# Altium PCB limit-sw1.PcbDoc
Units mm, origin at the board's own origin, x right, y up, seen from the top; angles counter-clockwise.
Board outline 18.89 x 14.5 mm, 2 copper layers (Top Layer, Bottom Layer), stack 1.07 mm thick; 4 components, 6 nets, 30 pads, 6 vias.
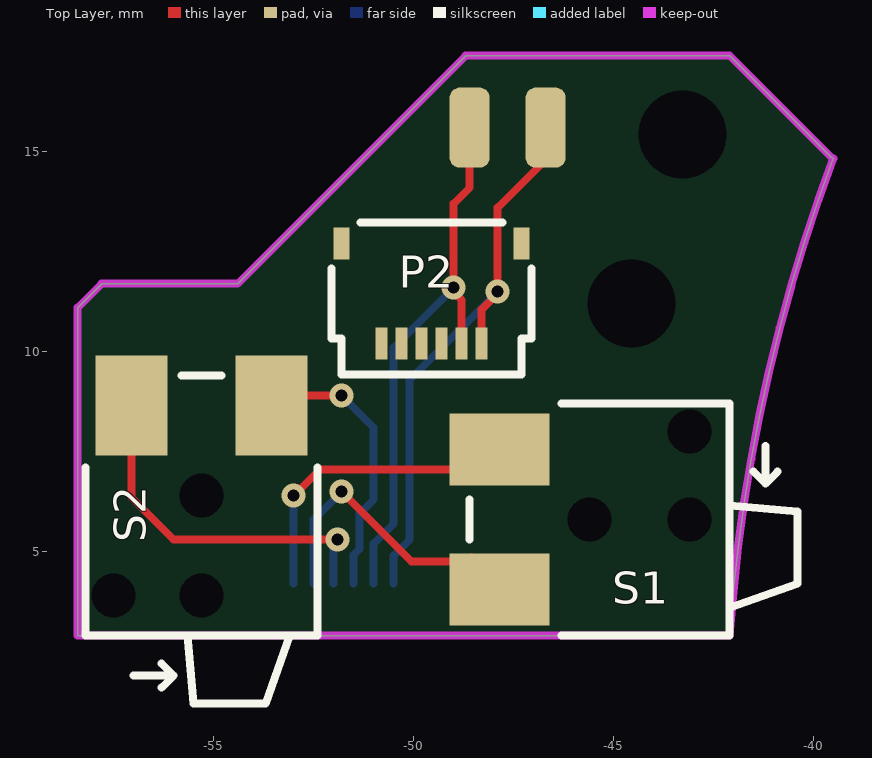
[diagram p0: Top Layer view]
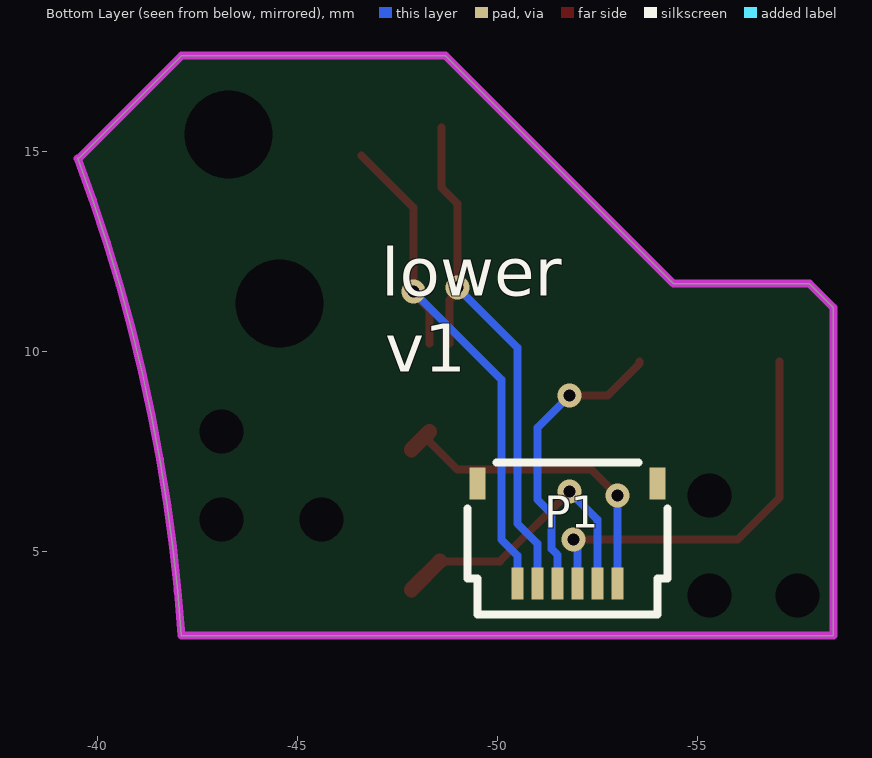
[diagram p1: Bottom Layer view, seen from below]
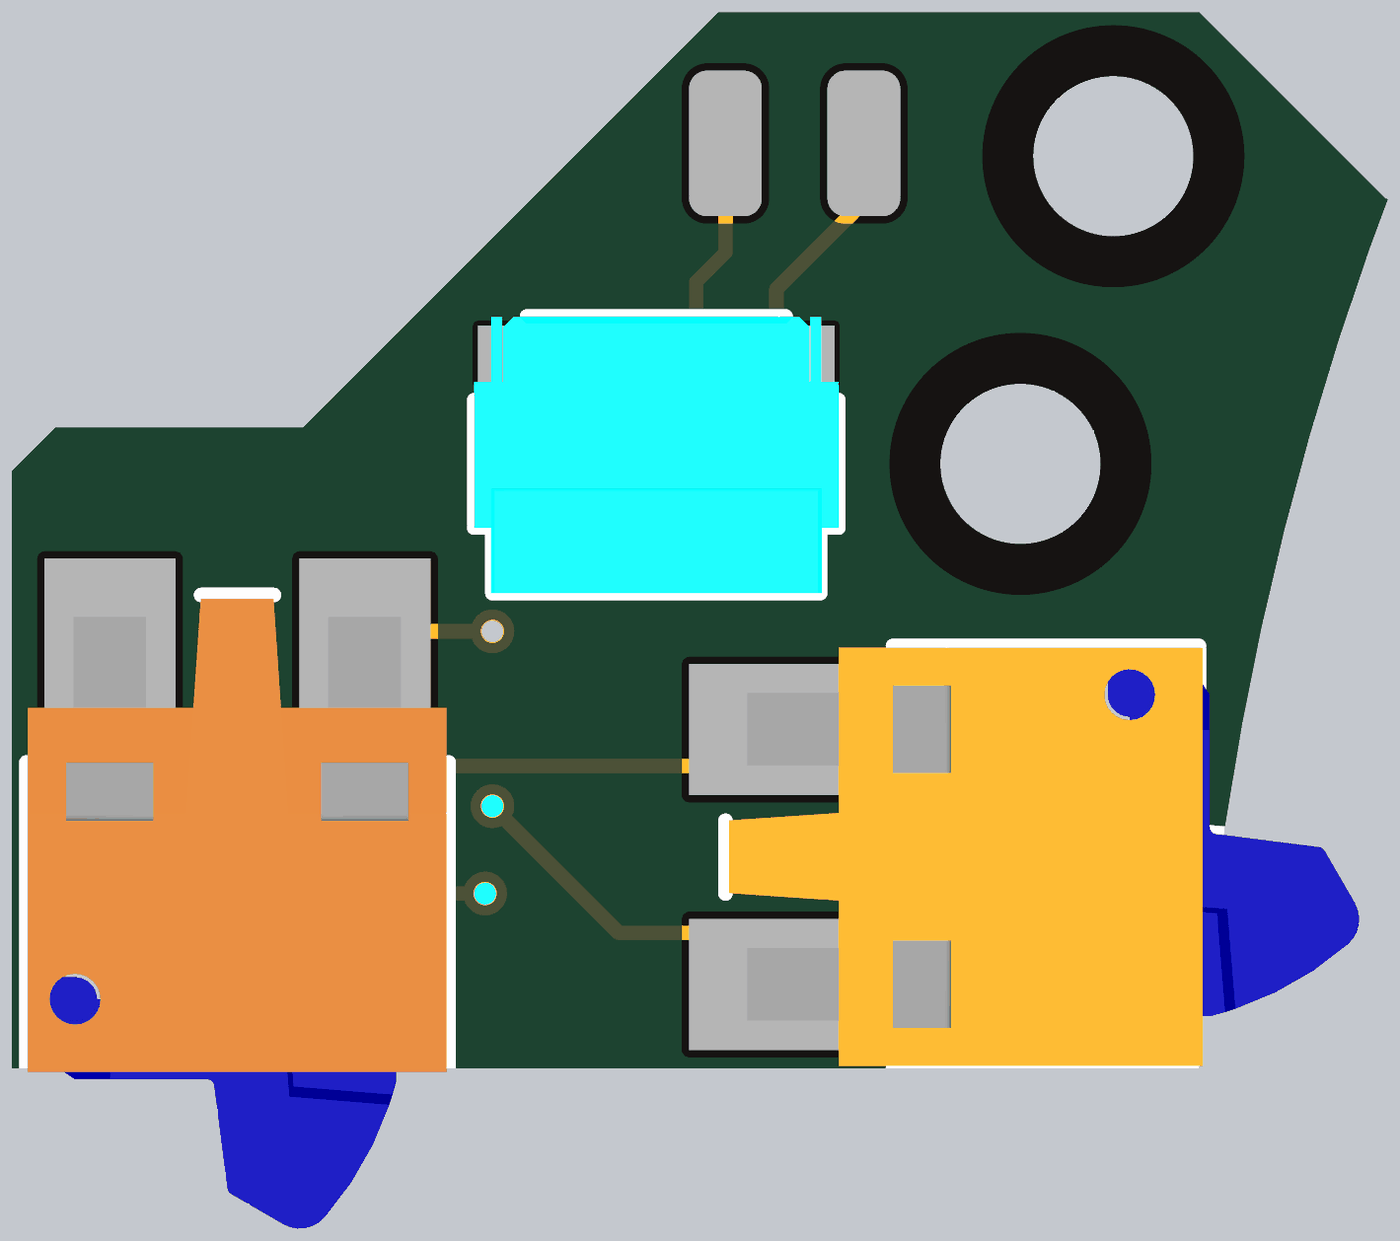
[diagram p2: 3D render of the assembled board from above, using the file's embedded part models]

## Layer stack, top to bottom
Top Solder: solder mask 0.0254, SM-001, Dk 4
Top Layer: signal copper 0.035
Dielectric 1: core 1, Core-043, Dk 4.3
Bottom Layer: signal copper 0.035
Bottom Solder: solder mask 0.0254, SM-001, Dk 4

## Board outline
-58.4,2.9 -58.4,11.1 -57.8,11.7 -54.4,11.7 -48.7,17.4 -42.1,17.4 -39.55,14.85 -39.507,14.834 ccw(c0,0) -42.1,2.9

## Design rules (kind name [scope] priority, off if disabled: settings)
Clearance [All] p1: gap=0.15 ignorepadtopadclearanceinfootprint=FALSE except(0: Arc-Hole Track-Hole SMDPad-Hole THPad-Hole Via-Hole Fill-Hole Poly-Hole Region-Hole Text-Hole)
PolygonConnect [All] p1: connectstyle=Relief reliefconductorwidth=0.254 reliefentries=4 polygonreliefangle="90 Angle" airgapwidth=0.254
RoutingVias [All] p1: holewidth=0.3 width=0.6 viastyle="Through Hole" minholewidth=0.3 minwidth=0.6 maxholewidth=0.5 maxwidth=0.8
SolderMaskExpansion [All] p1: expansion=0.102 istentingtop=FALSE
Width [All] p1: maxlimit=5 minlimit=0.15 preferedwidth=0.15
30 further rules are at their usual default settings.

## Components (designator, comment, footprint, x,y, rotation, side; value= is the part's Value field where it differs from the comment)
P1 "FH34SRJ-6S-0.5SH(50)" HRS_FH34SRJ-6S-0.5SH(50) -51.75,4.2 r0 bottom
P2 "FH34SRJ-6S-0.5SH(50)" HRS_FH34SRJ-6S-0.5SH(50) -49.55,10.2 r180 top
S1 "SW-SPST" ESE22MH22 -45.6,5.8 r270 top
S2 "SW-SPST" ESE22MH24 -55.3,6.4 r180 top

## Footprints (in the part's own frame and the unit in brackets; to place one, negate y for a bottom-side part, rotate by r counter-clockwise, add the part's x,y. Pads: shape width x height; smd on the part's side, far side on the other; paste and mask are expansions set on the pad)
ESE22MH22 [mm] "Detector switch"
  round 1 hole 1.1 unplated: 0(-2.2,2.5) 0(0,2.5) 0(0,0)
  rect 1.8x2.5 smd: 1(-1.75,-2.25) 2(1.75,-2.25)
  silkscreen extent -2.9,-3 2.9,5.2, body extent -2.88,-2.95 2.87,5.7, height 2
ESE22MH24 [mm] "Detector switch"
  round 1 hole 1.1 unplated: 0(0,2.5) 0(0,0) 0(2.2,2.5)
  rect 1.8x2.5 smd: 1(-1.75,-2.25) 2(1.75,-2.25)
  silkscreen extent -2.9,-3 2.9,5.2, body extent -2.87,-2.95 2.88,5.7, height 2
HRS_FH34SRJ-6S-0.5SH(50) [mm] "Top/bottom entry, back-lock 0.3mm thick FPC, 6 pins"
  rect 0.4x0.8 smd mask+0.07: 0(-2.25,-2.5) 0(2.25,-2.5)
  rect 0.3x0.8 smd mask+0.07: 1(1.25,0) 2(0.75,0) 3(0.25,0) 4(-0.25,0) 5(-0.75,0) 6(-1.25,0)
  silkscreen extent -2.5,-3.03 2.5,0.77, body extent -2.5,-3.02 2.5,0.78, height 1

## Part data
P1 P2: library part "Header 6", "Header, 6-Pin", LatestRevisionDate=17-Jul-2002, LatestRevisionNote="Re-released for DXP Platform.", MPN=FH34SRJ-6S-0.5SH(50), MYPN=J-FH34SRJ-6S-0.5SH(50), Publisher="Altium Limited", VENDOR=HRS
S1: "Single-Pole, Single-Throw Switch", MPN=ESE22MH22, LatestRevisionDate=17-Jul-2002, LatestRevisionNote="Re-released for DXP Platform.", MFG=Panasonic, PackageReference=SPST-2, Published=24-Mar-1999, Publisher="Altium Limited"
S2: "Single-Pole, Single-Throw Switch", MPN=ESE22MH24, LatestRevisionDate=17-Jul-2002, LatestRevisionNote="Re-released for DXP Platform.", MFG=Panasonic, PackageReference=SPST-2, Published=24-Mar-1999, Publisher="Altium Limited"

## Free pads (board coordinates)
  round 1 hole 2.2 unplated mask+1.3: 0(-44.55,11.2) 0(-43.275,15.425)
  rrect50% 1x2 smd: 1(-46.7,15.6) 2(-48.6,15.6)

## Via types
v1: diameter 0.6, hole 0.3, Top Layer to Bottom Layer, tented both sides, 6 vias

## Nets (pads, with @x,y where several pads share a name; then routed paths per layer and width w, separated by ;. In a path a pad name is that pad's centre, name@x,y a point inside that pad or via, vN(x,y) a via of type N, cw(c..) or ccw(c..) an arc to the next point about the centre after c; other vN are vias at no path point)
NetP1_1: P1.1 P2.6 pad.1 | length 13.8
  Top Layer w0.2: P2.6 -48.3,11.051 -47.9,11.451 v1(-47.9,11.5) -47.9,13.6 pad.1@-46.6,14.9
  Bottom Layer w0.2: P1.1 -50.5,4.9 -50.1,5.3 -50.1,9.3 v1(-47.9,11.5)
NetP1_2: P1.2 P2.5 pad.2 | length 13.9
  Top Layer w0.2: P2.5 -48.8,11.292 -49,11.492 v1(-49,11.6) -49,13.7 -48.6,14.1 pad.2
  Bottom Layer w0.2: P1.2 -51,5.2 -50.5,5.7 -50.5,10.1 v1(-49,11.6)
NetP1_3: P1.3 S2.1 | length 7.4
  Top Layer w0.2: S2.1@-53.55,9.75 -53.55,9.7 -52.75,8.9 v1(-51.8,8.9)
  Bottom Layer w0.2: v1(-51.8,8.9) -51,8.1 -51,6.3 -51.35,5.95 -51.35,5.072 -51.5,4.922 P1.3
NetP1_4: P1.4 S2.2 | length 10.1
  Top Layer w0.2: S2.2@-57.05,9.75 S2.2 -57.05,6.35 -56,5.3 v1(-51.9,5.3)
  Bottom Layer w0.2: P1.4 -52,5.092 -51.9,5.192 v1(-51.9,5.3)
NetP1_5: P1.5 S1.2 | length 7.6
  Top Layer w0.2: v1(-51.8,6.5) -50.06,4.76 S1.2@-48.56,4.76
  Top Layer w0.381: S1.2@-48.56,4.76 S1.2
  Bottom Layer w0.2: P1.5 -52.5,5.8 v1(-51.8,6.5)
NetP1_6: P1.6 S1.1 | length 8.3
  Top Layer w0.2: v1(-53,6.4) -52.35,7.05 -49,7.05 -48.3,7.75 S1.1@-48.3,8
  Top Layer w0.381: S1.1@-48.3,8 S1.1
  Bottom Layer w0.2: P1.6 v1(-53,6.4)
pads on no net: P1.0 P2.0 P2.1 P2.2 P2.3 P2.4 S1.0 S2.0

## Keep-outs
Keep-Out Layer:
  lines w0.2: -39.55,14.85 -42.1,17.4 -48.7,17.4 -54.4,11.7 -57.8,11.7 -58.4,11.1 -58.4,2.9 -42.1,2.9 cw(c0,0) -39.507,14.834

## Silkscreen, mask and mechanical layers (free items; w line width, h text height)
Bottom Overlay:
  text "lower" at -47.1,11.4 h1.2
  text "v1" at -47.2,9.5 h1.2
Mechanical 2:
  circle w0.05: c-19.5,27.5 r0.025
  lines w0.05: -45.667,5.088 cw(c0,0) -32.777,32.203 ; -41.679,2.094 cw(c0.048,0.016) -31.033,27.933
  lines w0.1: -52.871,0 0,0 0,39.653 ; -31.457,22.319 -29.616,24.54 -27.229,22.562 -28.843,20.615 ; -17.5,30.901 -17.5,39.653 ; 4.899,30 -19.5,30 -19.5,29.5 ; -37.863,6.764 cw(c0,0) -21.852,31.652 ; -37.863,6.764 ccw(c-36.386,6.5) -36.386,5 ; -37.863,6.764 ccw(c-36.386,6.5) -36.386,5 ; -37.863,6.764 cw(c0,0) -21.852,31.652 ; -36.386,5 -36.285,5 ; -36.386,5 -36.285,5 ; -36.285,5 ccw(c-36.285,6.5) -34.808,6.236 ; -36.285,5 ccw(c-36.285,6.5) -34.808,6.236 ; -34.808,6.236 cw(c0,0) -20.145,29.063 ; -34.808,6.236 cw(c0,0) -20.145,29.063 ; -31.5,37.153 -31.5,36.806 ccw(c0,0) -48.222,4.644 ccw(c-46.729,4.5) -46.729,3 -34.923,3 ccw(c-34.923,4.5) -33.436,4.308 cw(c0,0) -17.9,28.567 -17.9,30 -17.5,30 -17.5,37.153 ; -31.5,37.153 -17.5,37.153 ; -31.5,37.153 -31.5,26.626 ccw(c0,0) -41.136,3 -33.578,3 cw(c0,0) -17.5,28.814 -17.5,37.153 ; -31.5,37.153 -17.5,37.153 ; -21.852,31.652 cw(c-21,30.417) -19.5,30.417 ; -21.852,31.652 cw(c-21,30.417) -19.5,30.417 ; -20.145,29.063 ccw(c-21,30.296) -19.5,30.296 ; -20.145,29.063 ccw(c-21,30.296) -19.5,30.296 ; -19.5,29.5 ccw(c0,0) -35.007,5 -38.136,5 cw(c0,0) -19.5,33.153 -19.5,29.5 ; -19.5,30.296 -19.5,30.417 ; -19.5,30.296 -19.5,30.417 ; -46.572,6.656 ccw(c-45.483,6.5) -44.394,6.344 cw(c0,0) -32.698,30.691 ccw(c-33.5,31.444) -34.302,32.197 ccw(c0,0) -46.572,6.656
  lines w0.2: -31.033,27.933 -28.7,25.6
Mechanical 3:
  lines w0.381: -51.312,53.604 -40.9,53.604 -17.284,53.604 -2.048,53.604 14.458,53.604 28.932,53.604 ; -51.312,56.652 -40.9,56.652 -17.284,56.652 -2.048,56.652 14.458,56.652 28.932,56.652 ; -51.312,59.7 -40.9,59.7 -17.284,59.7 -2.048,59.7 14.458,59.7 28.932,59.7 ; -51.312,62.748 -40.9,62.748 -17.284,62.748 -2.048,62.748 14.458,62.748 28.932,62.748 ; -51.312,65.796 -40.9,65.796 -17.284,65.796 -2.048,65.796 14.458,65.796 28.932,65.796 ; -51.312,68.844 -40.9,68.844 -17.284,68.844 -2.048,68.844 14.458,68.844 28.932,68.844 ; -51.312,71.892 28.932,71.892 ; -40.9,74.94 -40.9,50.556 ; -17.284,74.94 -17.284,50.556 ; -2.048,74.94 -2.048,50.556 ; 14.458,74.94 14.458,50.556 ; -40.9,50.556 -51.312,50.556 -51.312,74.94 28.932,74.94 28.932,50.556 14.458,50.556 ; -40.9,50.556 -17.284,50.556 ; -17.284,50.556 -2.048,50.556 ; -2.048,50.556 14.458,50.556
  text "Layer" at -49.534,72.654 h1.52
  text "Name" at -39.122,72.654 h1.52
  text "Material" at -15.506,72.654 h1.52
  text "Thickness" at -0.27,72.654 h1.52
  text "Constant" at 16.236,72.654 h1.52
  text "Top Overlay" at -39.122,69.606 h1.52
  text "Top Solder" at -39.122,66.558 h1.52
  text "SM-001" at -15.506,66.558 h1.52
  text "0.025mm" at -0.27,66.558 h1.52
  text "4" at 16.236,66.558 h1.52
  text "1" at -49.534,63.51 h1.52
  text "Top Layer" at -39.122,63.51 h1.52
  text "CF-004" at -15.506,63.51 h1.52
  text "0.035mm" at -0.27,63.51 h1.52
  text "Dielectric 1" at -39.122,60.462 h1.52
  text "Core-043" at -15.506,60.462 h1.52
  text "1.000mm" at -0.27,60.462 h1.52
  text "4.3" at 16.236,60.462 h1.52
  text "2" at -49.534,57.414 h1.52
  text "Bottom Layer" at -39.122,57.414 h1.52
  text "CF-004" at -15.506,57.414 h1.52
  text "0.035mm" at -0.27,57.414 h1.52
  text "Bottom Solder" at -39.122,54.366 h1.52
  text "SM-001" at -15.506,54.366 h1.52
  text "0.025mm" at -0.27,54.366 h1.52
  text "4" at 16.236,54.366 h1.52
  text "Bottom Overlay" at -39.122,51.318 h1.52
  text "Surface Finish: HASL" at -39.6,47.7 h1.5
  text "Solder mask: Green / Silk: White" at -39.6,44.9 h1.5